# EAGLE board pcbqr_v3_allinone (EAGLE 5.11), part 1 of 2
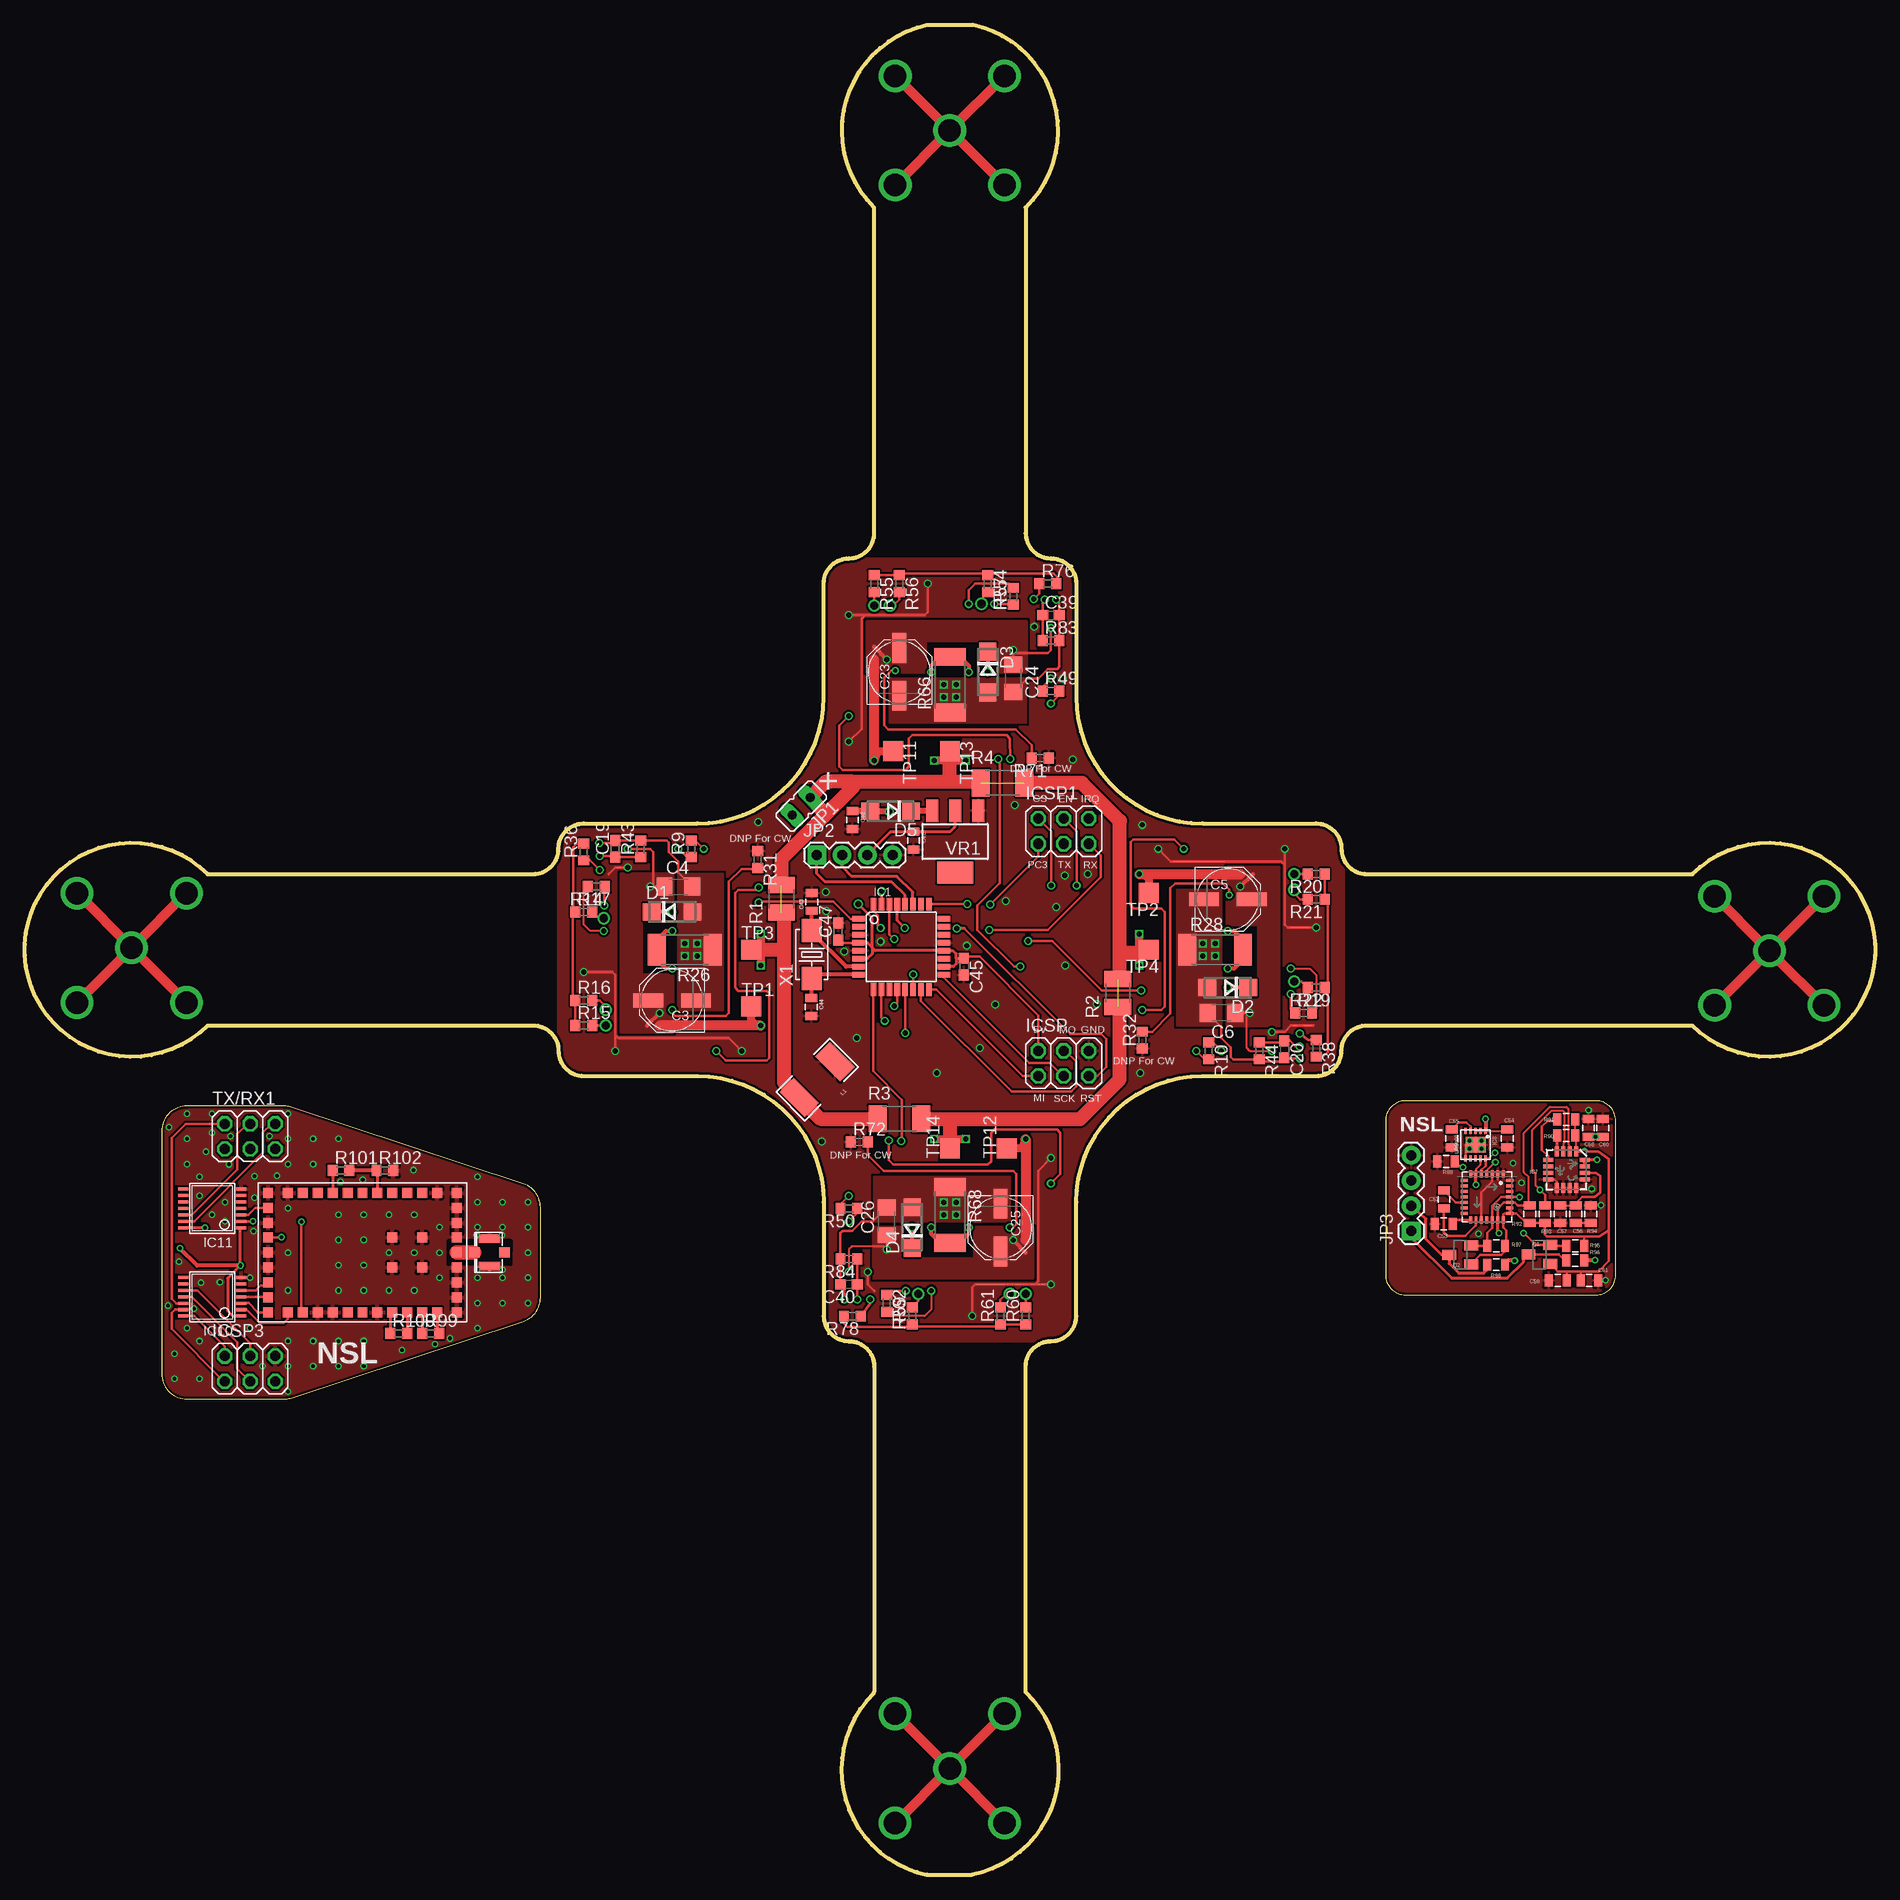
[diagram p0: board, top side]
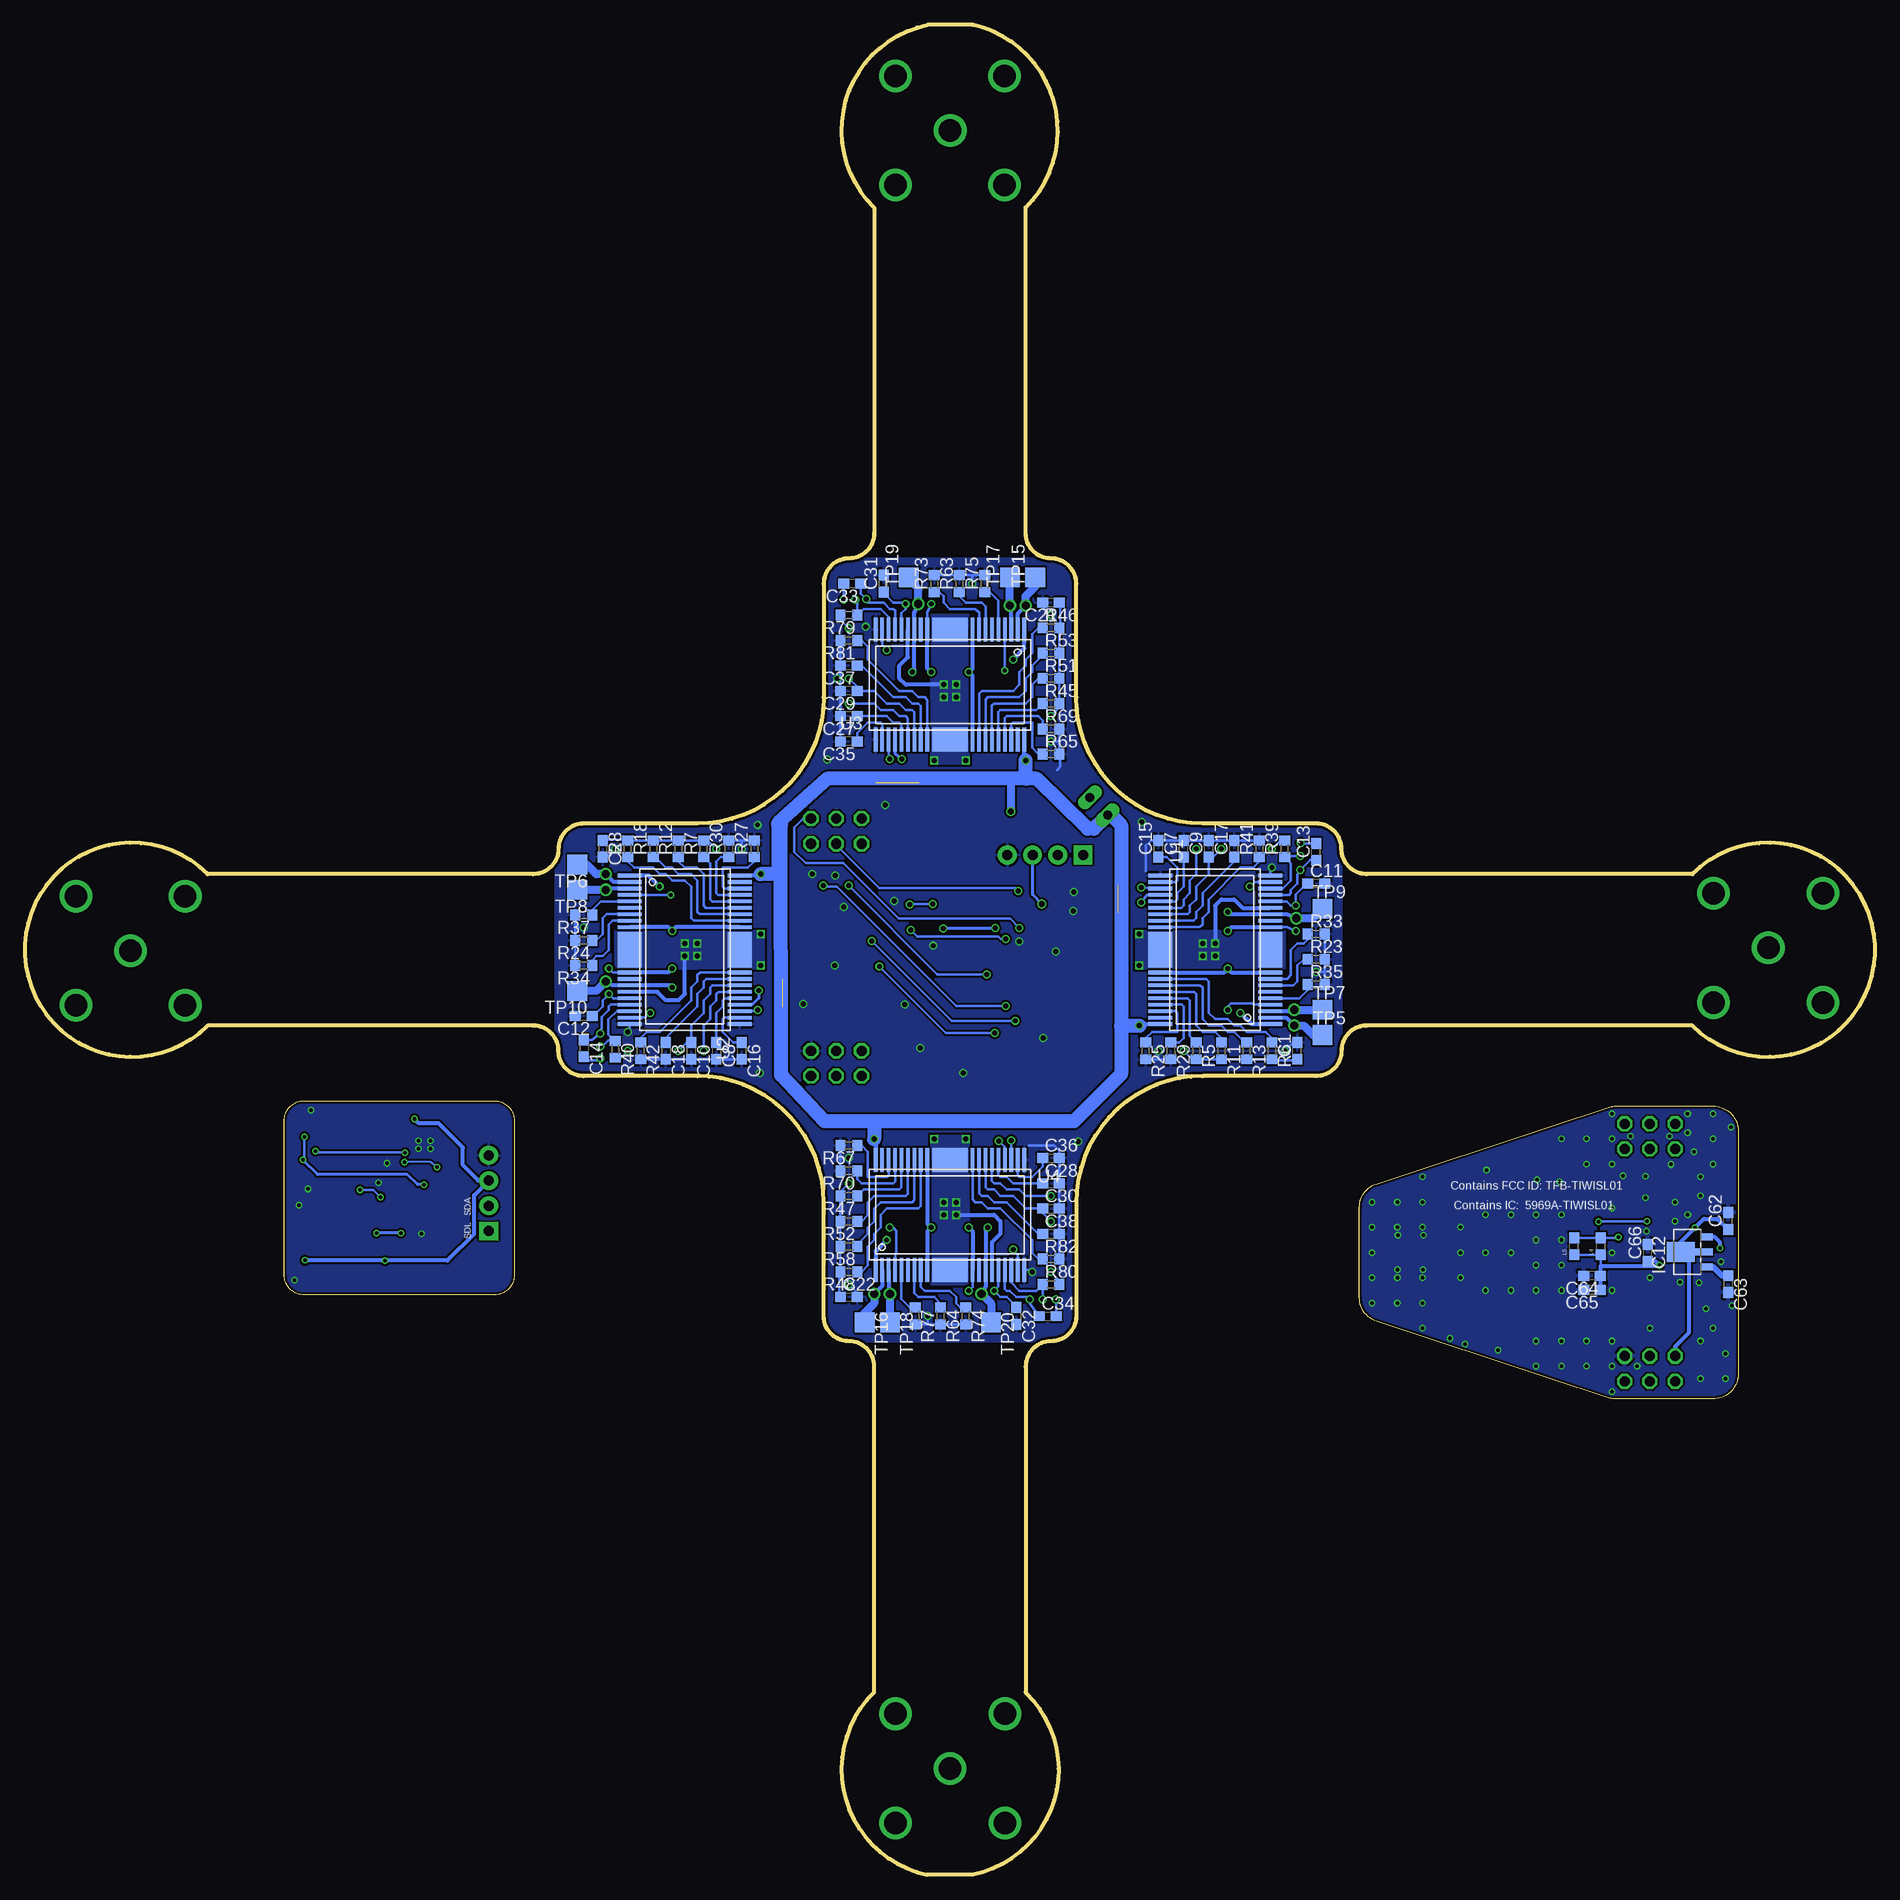
[diagram p1: board, bottom side, seen from below]

Size 186.07 x 186.08 mm. Coordinates in mm from the lower left corner, seen from the top.
Outline: 85.41,18.39 85.41,51.13 arc90 82.87,53.67 arc-90 80.33,56.21 80.33,67.64 arc90 67.63,80.34 56.2,80.34 arc-90 53.66,82.88 arc90 51.12,85.42 18.38,85.42 arc-270 18.38,100.66 51.12,100.66 arc90 53.66,103.2 arc-90 56.2,105.74 67.63,105.74 arc90 80.33,118.44 80.33,129.87 arc-90 82.87,132.41 arc90 85.41,134.95 85.41,167.69 arc-123 90.72,186.08 95.29,186.08 arc-124 100.65,167.69 100.65,134.95 arc90 103.19,132.41 arc-90 105.73,129.87 105.73,118.44 arc90 118.43,105.74 129.86,105.74 arc-90 132.4,103.2 arc90 134.94,100.66 167.68,100.66 arc-270 167.68,85.42 134.94,85.42 arc90 132.4,82.88 arc-90 129.86,80.34 118.43,80.34 arc90 105.73,67.64 105.73,56.21 arc-90 103.19,53.67 arc90 100.65,51.13 100.65,18.39
Outline: 85.36,18.26 arc124 90.72,0 95.29,0 arc124 100.65,18.36
Outline: 159.99,75.85 arc90 157.99,77.85 138.85,77.85 arc90 136.85,75.85 136.85,60.32 arc90 138.85,58.32 157.99,58.32 arc90 159.99,60.32 159.99,75.85
Outline: 26.85,77.19 arc18 26.05,77.32 16.3,77.32 arc90 13.76,74.78 13.76,50.39 arc90 16.3,47.85 26.05,47.85 arc18 26.85,47.98 50.12,55.66 arc72 51.86,58.07 51.86,67.1 arc72 50.12,69.51 26.85,77.19
Copper layers (1*16): Top 0.035mm / dielectric 1.5mm / Bottom 0.035mm
Design rules "ITead_rule *": minimum track width 6mil, minimum drill 12mil, track to track 6mil, track to pad 6mil, pad to pad 6mil, via to via 6mil, smd to smd 0mil, copper to edge 10mil, drill to drill 10mil, minimum pad ring 10mil, minimum via ring 6mil, stop-mask expansion 2mil, vias tented up to drill 20mil, thermal gap 10mil
Net classes: 0 default: width 0.203 mm, drill 0.356 mm, clearance 0.203 mm; 1 power: width 0.203 mm; 3 usbvcc: width 0.508 mm, drill 0.381 mm, clearance 0.203 mm
tRestrict: area 42.1,123.1 to 48.3,124.9; area 41.4,135.5 to 47.6,137.4; area 42.6,61.4 to 48.9,63.8
bRestrict: area 42.1,123.1 to 48.3,124.9; area 41.4,135.5 to 47.7,137.4

## Footprints (pad centres in the part's own frame; a part is rotated, then mirrored left to right if it is on the bottom)
U.FL = smd 2.2 x 0.85: P$1 0,1.375; P$2 0,-1.375 | smd 1.05 x 1: P$3 1.525,0; P$4 -1.525,0
C0603 = smd 1.1 x 1: 1 -0.85,0; 2 0.85,0
PANASONIC_D = smd 3 x 1.4: + 2.4,0; - -2.4,0
C1206 = smd 1.6 x 1.8: 1 -1.4,0; 2 1.4,0
0805 = smd 0.8 x 1.2: 1 -0.9,0; 2 0.9,0
SMA = smd 1.8 x 1.7: A 2.05,0; C -2.05,0
TQFP32-08 = smd 1.27 x 0.559: 1 -4.293,2.8; 2 -4.293,2; 3 -4.293,1.2; 4 -4.293,0.4; 5 -4.293,-0.4; 6 -4.293,-1.2; 7 -4.293,-2; 8 -4.293,-2.8; 17 4.293,-2.8; 18 4.293,-2; 19 4.293,-1.2; 20 4.293,-0.4; 21 4.293,0.4; 22 4.293,1.2; 23 4.293,2; 24 4.293,2.8 | smd 0.559 x 1.27: 9 -2.8,-4.293; 10 -2,-4.293; 11 -1.2,-4.293; 12 -0.4,-4.293; 13 0.4,-4.293; 14 1.2,-4.293; 15 2,-4.293; 16 2.8,-4.293; 25 2.8,4.293; 26 2,4.293; 27 1.2,4.293; 28 0.4,4.293; 29 -0.4,4.293; 30 -1.2,4.293; 31 -2,4.293; 32 -2.8,4.293
LGA28-5X5 = smd 0.7 x 0.3: 1 -2.3,1.65; 2 -2.3,1.1; 3 -2.3,0.55; 4 -2.3,0; 5 -2.3,-0.55; 6 -2.3,-1.1; 7 -2.3,-1.65; 15 2.3,-1.65; 16 2.3,-1.1; 17 2.3,-0.55; 18 2.3,0; 19 2.3,0.55; 20 2.3,1.1; 21 2.3,1.65 | smd 0.3 x 0.7: 8 -1.65,-2.3; 9 -1.1,-2.3; 10 -0.55,-2.3; 11 0,-2.3; 12 0.55,-2.3; 13 1.1,-2.3; 14 1.65,-2.3; 22 1.65,2.3; 23 1.1,2.3; 24 0.55,2.3; 25 0,2.3; 26 -0.55,2.3; 27 -1.1,2.3; 28 -1.65,2.3
LGA16-4X4 = smd 1 x 0.4: 1 -1.85,0.975; 2 -1.85,0.325; 3 -1.85,-0.325; 4 -1.85,-0.975; 9 1.85,-0.975; 10 1.85,-0.325; 11 1.85,0.325; 12 1.85,0.975 | smd 0.4 x 1: 5 -0.975,-1.85; 6 -0.325,-1.85; 7 0.325,-1.85; 8 0.975,-1.85; 13 0.975,1.85; 14 0.325,1.85; 15 -0.325,1.85; 16 -0.975,1.85
LLP-10 = smd 0.25 x 0.6: P$1 -1,-1.4; P$2 -0.5,-1.4; P$3 0,-1.4; P$4 0.5,-1.4; P$5 1,-1.4; P$6 1,1.4; P$7 0.5,1.4; P$8 0,1.4; P$9 -0.5,1.4; P$10 -1,1.4 | smd 2 x 1.6: P$11 0,0
TIWI-SL = smd 1 x 1: P$1 -6,7.5; P$2 -6,6; P$3 -6,4.5; P$4 -6,3; P$5 -6,1.5; P$6 -6,0; P$7 -6,-1.5; P$8 -6,-3; P$9 -6,-4.5; P$10 -6,-6; P$11 -6,-7.5; P$12 -6,-9.5; P$13 -4.5,-9.5; P$14 -3,-9.5; P$15 -1.5,-9.5; P$16 0,-9.5; P$17 1.5,-9.5; P$18 3,-9.5; P$19 4.5,-9.5; P$20 6,-9.5; P$21 6,-7.5; P$22 6,-6; P$23 6,-4.5; P$24 6,-3; P$25 6,-1.5; P$26 6,0; P$27 6,1.5; P$28 6,3; P$29 6,4.5; P$30 6,6; P$31 6,7.5; P$32 6,9.5; P$33 4.5,9.5; P$34 3,9.5; P$35 1.5,9.5; P$36 0,9.5; P$37 -1.5,9.5; P$38 -3,9.5; P$39 -4.5,9.5; P$40 -6,9.5; P$41 -1.5,6; P$42 1.5,6; P$43 -1.5,3; P$44 1.5,3
TSSOP-14 = smd 0.305 x 0.991: 1 -1.95,-2.918; 2 -1.3,-2.918; 3 -0.65,-2.918; 4 0,-2.918; 5 0.65,-2.918; 6 1.3,-2.918; 7 1.95,-2.918; 8 1.95,2.918; 9 1.3,2.918; 10 0.65,2.918; 11 0,2.918; 12 -0.65,2.918; 13 -1.3,2.918; 14 -1.95,2.918
SOT89-3L = smd 0.7 x 1.1: 1 -1.5,-1.75; 3 1.5,-1.75 | smd 0.7 x 1.8: 2 0,-1.4 | smd 2 x 2.8: 4 0,0.9
2X03 = drill 1.016 octagon: 1 -2.54,-1.27; 2 -2.54,1.27; 3 0,-1.27; 4 0,1.27; 5 2.54,-1.27; 6 2.54,1.27
JP1 = drill 0.914 long: 1 0,-1.27; 2 0,1.27
1X04 = drill 1.016 pad 1.88 square: 1 0,0 | drill 1.016 pad 1.88 round: 2 2.54,0; 3 5.08,0; 4 7.62,0
INDUCTOR-1206 = smd 2.032 x 3.556: P$1 -2.54,0; P$2 2.54,0
0603 = smd 1.1 x 1: 1 -0.85,0; 2 0.85,0
SOT23 = smd 1 x 1.4: 1 -0.95,-1.1; 2 0.95,-1.1; 3 0,1.1
R1210 = smd 1.6 x 2.7: 1 -1.4,0; 2 1.4,0
R2010 = smd 1.8 x 2.7: 1 -2.2,0; 2 2.2,0
R0603 = smd 1 x 1.1: 1 -0.85,0; 2 0.85,0
R2512 = smd 1.8 x 3.2: 1 -2.8,0; 2 2.8,0
TP20SQ = smd 2 x 2: TP 0,0
HSOP36-P-450-0.65 = smd 0.38 x 2.4: 1 -7.475,-5.525; 2 -6.825,-5.525; 3 -6.175,-5.525; 4 -5.525,-5.525; 5 -4.875,-5.525; 6 -4.225,-5.525; 7 -3.575,-5.525; 8 -2.925,-5.525; 9 -2.275,-5.525; 10 2.275,-5.525; 11 2.925,-5.525; 12 3.575,-5.525; 13 4.225,-5.525; 14 4.875,-5.525; 15 5.525,-5.525; 16 6.175,-5.525; 17 6.825,-5.525; 18 7.475,-5.525; 19 7.475,5.525; 20 6.825,5.525; 21 6.175,5.525; 22 5.525,5.525; 23 4.875,5.525; 24 4.225,5.525; 25 3.575,5.525; 26 2.925,5.525; 27 2.275,5.525; 28 -2.275,5.525; 29 -2.925,5.525; 30 -3.575,5.525; 31 -4.225,5.525; 32 -4.875,5.525; 33 -5.525,5.525; 34 -6.175,5.525; 35 -6.825,5.525; 36 -7.475,5.525 | smd 3.6 x 2.4: P1 0,-5.525; P2 0,5.525
SOT-223 = smd 1.219 x 2.235: 1 -2.311,-3.099; 2 0,-3.099; 3 2.311,-3.099 | smd 3.6 x 2.2: 4 0,3.099
5032 = smd 2.286 x 2.032: 1 -2.413,0; 2 2.413,0

## Placement (x,y rotation side)
ANT1  U.FL  [U.FL]  46.73,62.59 180 top
C1  1uF  [C0603]  58.11,82.88 90 bottom
C2  1uF  [C0603]  127.96,103.2 270 bottom
C3  68uF  [PANASONIC_D]  65.09,87.96 180 top
C4  10uF  [C1206]  65.73,99.39 0 top
C5  68uF  [PANASONIC_D]  120.97,98.12 0 top
C6  10uF  [C1206]  120.34,86.69 180 top
C7  0.1uF  [C0603]  69.54,103.2 90 bottom
C8  0.1uF  [C0603]  116.53,82.88 270 bottom
C9  1uF  [C0603]  67,103.2 90 bottom
C10  1uF  [C0603]  119.07,82.88 270 bottom
C11  0.1uF  [C0603]  56.2,99.71 0 bottom
C12  0.1uF  [C0603]  129.86,86.37 180 bottom
C13  DNP  [C0603]  56.2,102.9 90 bottom
C14  DNP  [C0603]  129.86,83.13 270 bottom
C15  DNP  [C0603]  72.08,103.2 90 bottom
C16  DNP  [C0603]  113.99,82.88 270 bottom
C17  100pF  [C0603]  64.46,103.2 90 bottom
C18  100pF  [C0603]  121.61,82.88 270 bottom
C19  0.1uF  [C0603]  59.38,103.2 90 top
C20  0.1uF  [C0603]  126.66,83.03 270 top
C21  1uF  [C0603]  82.87,127.97 180 bottom
C22  1uF  [C0603]  103.19,58.12 0 bottom
C23  68uF  [PANASONIC_D]  87.95,120.98 90 top
C24  10uF  [C1206]  99.38,120.35 270 top
C25  68uF  [PANASONIC_D]  98.11,65.1 270 top
C26  10uF  [C1206]  86.68,65.74 90 top
C27  0.1uF  [C0603]  103.19,116.54 180 bottom
C28  0.1uF  [C0603]  82.87,69.55 0 bottom
C29  1uF  [C0603]  103.19,119.08 180 bottom
C30  1uF  [C0603]  82.87,67.01 0 bottom
C31  0.1uF  [C0603]  99.7,129.87 90 bottom
C32  0.1uF  [C0603]  86.37,56.21 270 bottom
C33  DNP  [C0603]  102.86,129.87 180 bottom
C34  DNP  [C0603]  83.2,56.18 0 bottom
C35  DNP  [C0603]  103.19,114 180 bottom
C36  DNP  [C0603]  82.87,72.09 0 bottom
C37  100pF  [C0603]  103.19,121.62 180 bottom
C38  100pF  [C0603]  82.87,64.47 0 bottom
C39  0.1uF  [C0603]  103.19,126.7 0 top
C40  0.1uF  [C0603]  82.87,59.39 180 top
C41  10uF  [0805]  89.36,104.01 270 top
C42  10uF  [0805]  83.23,106.1 270 top
C43  18pF  [0805]  79.11,97.87 90 top
C44  18pF  [0805]  79.06,87.27 270 top
C45  0.1uF  [C0603]  94.43,91.34 270 top
C47  0.1uF  [C0603]  81.81,94.87 90 top
C52  .22uF  [0805]  142.72,67.92 90 top
C53  4.7uF  [0805]  142.69,65.48 180 top
C54  1uF  [0805]  149.07,74.07 270 top
C55  10nF  [0805]  143.48,74.07 270 top
C56  470nF  [0805]  155.97,66.45 270 top
C57  10nF  [0805]  154.43,66.45 270 top
C58  100nf  [0805]  157.24,75.11 90 top
C59  100nf  [0805]  154.15,59.77 180 top
C60  10uf  [0805]  158.67,75.11 90 top
C61  10uf  [0805]  157.35,59.77 0 top
C62  0.1uF  [C0603]  14.78,65.76 90 bottom
C63  0.1uF  [C0603]  14.78,59.41 270 bottom
C64  0.1uF  [C0603]  28.47,60.25 180 bottom
C65  0.1uF  [C0603]  28.47,58.83 180 bottom
C66  .3pf  [C0603]  22.85,62.53 90 bottom
D1  SCHOTTKY_SMA  [SMA]  65.09,96.85 0 top
D2  SCHOTTKY_SMA  [SMA]  120.97,89.23 180 top
D3  SCHOTTKY_SMA  [SMA]  96.84,120.98 270 top
D4  SCHOTTKY_SMA  [SMA]  89.22,65.1 90 top
D5  SCHOTTKY_SMA  [SMA]  87.06,107.01 180 top
IC1  MEGA8-AI  [TQFP32-08]  88.13,93.34 0 top
IC6  LSM303DLHSMD  [LGA28-5X5]  147.03,68.17 270 top
IC7  L3G4200D  [LGA16-4X4]  155.03,70.92 270 top
IC8  LP5996  [LLP-10]  145.89,73.43 180 top
IC9  TIWI-SL  [TIWI-SL]  33.95,62.59 270 top
IC10  TXS0104EPWR  [TSSOP-14]  18.84,58.14 90 top
IC11  TXS0104EPWR  [TSSOP-14]  18.84,67.03 90 top
IC12  AP1115B  [SOT89-3L]  18.64,62.64 90 bottom
ICSP  ICSP  [2X03]  104.46,81.61 0 top
ICSP1  ICSP  [2X03]  104.46,104.98 0 top
ICSP3  ICSP  [2X03]  22.65,50.9 0 top
JP1  [JP1]  78.06,107.48 135 top
JP2  [1X04]  79.65,102.57 0 top
JP3  [1X04]  139.41,64.74 90 top
L1  HF70ACC321611-T  [INDUCTOR-1206]  79.67,79.98 225 top
L4  1nH CI160808-1N0D  [0603]  27.58,63.22 90 bottom
L5  1nH CI160808-1N0D  [0603]  30.27,63.22 90 bottom
Q1  BSS123  [SOT23]  152.32,62.38 90 top
Q2  BSS123  [SOT23]  144.34,62.36 90 top
R1  0R  [R1210]  76.09,98.17 90 top
R2  0R  [R1210]  109.9,88.7 90 top
R3  0R  [R2010]  87.95,76.05 0 top
R4  0R  [R2010]  98.32,109.83 0 top
R5  DNP  [R0603]  68.27,82.88 270 bottom
R6  10k  [R0603]  60.65,82.88 270 bottom
R7  DNP  [R0603]  117.8,103.2 90 bottom
R8  10k  [R0603]  125.42,103.2 90 bottom
R9  240k  [R0603]  67,103.2 90 top
R10  240k  [R0603]  119.07,82.88 270 top
R11  0  [R0603]  65.73,82.88 270 bottom
R12  0  [R0603]  120.34,103.2 90 bottom
R13  0  [R0603]  63.19,82.88 270 bottom
R14  10k  [R0603]  57.47,99.39 180 top
R15  10k  [R0603]  56.2,85.42 0 top
R16  10k  [R0603]  56.2,87.96 0 top
R17  10k  [R0603]  56.2,96.85 0 top
R18  0  [R0603]  122.88,103.2 90 bottom
R19  10k  [R0603]  128.59,86.69 0 top
R20  10k  [R0603]  129.86,100.66 180 top
R21  10k  [R0603]  129.86,98.12 180 top
R22  10k  [R0603]  129.86,89.23 180 top
R23  DNP  [R0603]  56.2,92.09 0 bottom
R24  DNP  [R0603]  129.86,93.99 180 bottom
R25  0  [R0603]  73.35,82.88 270 bottom
R26  0.2, 2W  [R2512]  66.36,93.04 180 top
R27  0  [R0603]  112.72,103.2 90 bottom
R28  0.2, 2W  [R2512]  119.7,93.04 0 top
R29  0  [R0603]  70.81,82.88 270 bottom
R30  0  [R0603]  115.26,103.2 90 bottom
R31  0  [R0603]  73.7,102.13 270 top
R32  0  [R0603]  112.39,83.95 90 top
R33  DNP  [R0603]  56.2,94.63 0 bottom
R34  DNP  [R0603]  129.86,91.45 180 bottom
R35  0  [R0603]  56.2,89.55 0 bottom
R36  0  [R0603]  56.2,102.9 90 top
R37  0  [R0603]  129.86,96.53 180 bottom
R38  0  [R0603]  129.86,83.13 270 top
R39  10k  [R0603]  59.38,103.2 90 bottom
R40  10k  [R0603]  126.69,83.03 270 bottom
R41  10k  [R0603]  61.92,103.2 90 bottom
R42  10k  [R0603]  124.15,82.88 270 bottom
R43  10k  [R0603]  61.92,103.2 90 top
R44  10k  [R0603]  124.15,82.88 270 top
R45  DNP  [R0603]  82.87,117.81 0 bottom
R46  10k  [R0603]  82.87,125.43 0 bottom
R47  DNP  [R0603]  103.19,68.28 180 bottom
R48  10k  [R0603]  103.19,60.66 180 bottom
R49  240k  [R0603]  103.19,119.08 0 top
R50  240k  [R0603]  82.87,67.01 180 top
R51  0  [R0603]  82.87,120.35 0 bottom
R52  0  [R0603]  103.19,65.74 180 bottom
R53  0  [R0603]  82.87,122.89 0 bottom
R54  10k  [R0603]  99.38,128.6 90 top
R55  10k  [R0603]  85.41,129.87 270 top
R56  10k  [R0603]  87.95,129.87 270 top
R57  10k  [R0603]  96.84,129.87 270 top
R58  0  [R0603]  103.19,63.2 180 bottom
R59  10k  [R0603]  86.68,57.48 270 top
R60  10k  [R0603]  100.65,56.21 90 top
R61  10k  [R0603]  98.11,56.21 90 top
R62  10k  [R0603]  89.22,56.21 90 top
R63  DNP  [R0603]  92.08,129.87 90 bottom
R64  DNP  [R0603]  93.99,56.21 270 bottom
R65  0  [R0603]  82.87,112.73 0 bottom
R66  0.2, 2W  [R2512]  93.03,119.71 90 top
R67  0  [R0603]  103.19,73.36 180 bottom
R68  0.2, 2W  [R2512]  93.03,66.37 270 top
R69  0  [R0603]  82.87,115.27 0 bottom
R70  0  [R0603]  103.19,70.82 180 bottom
R71  0  [R0603]  102.1,112.32 180 top
R72  0  [R0603]  83.91,73.71 0 top
R73  DNP  [R0603]  94.62,129.87 90 bottom
R74  DNP  [R0603]  91.45,56.21 270 bottom
R75  0  [R0603]  89.54,129.87 90 bottom
R76  0  [R0603]  102.86,129.87 0 top
R77  0  [R0603]  96.53,56.21 270 bottom
R78  0  [R0603]  83.23,56.18 180 top
R79  10k  [R0603]  103.19,126.7 180 bottom
R80  10k  [R0603]  82.87,59.39 0 bottom
R81  10k  [R0603]  103.19,124.16 180 bottom
R82  10k  [R0603]  82.87,61.93 0 bottom
R83  10k  [R0603]  103.19,124.16 0 top
R84  10k  [R0603]  82.87,61.93 180 top
R89  10k  [0805]  142.92,71.73 0 top
R90  10k  [0805]  155.01,74.37 0 top
R91  10k  [0805]  155.01,75.97 0 top
R92  4.7k  [0805]  151.35,66.45 270 top
R93  4.7k  [0805]  152.88,66.45 270 top
R94  10k  [0805]  157.47,66.45 270 top
R95  10k  [0805]  155.92,63.27 0 top
R96  10k  [0805]  155.92,61.77 0 top
R97  10k  [0805]  147.95,63.27 0 top
R98  10k  [0805]  147.95,61.37 0 top
R99  0R  [R0603]  40.81,54.46 0 top
R100  0R  [R0603]  37.59,54.46 0 top
R101  0R  [R0603]  31.79,70.84 0 top
R102  0R - TEST DNP  [R0603]  36.21,70.84 0 top
TP1  TPTP20SQ  [TP20SQ]  73.03,87.33 0 top
TP2  TPTP20SQ  [TP20SQ]  113.04,98.76 180 top
TP3  TPTP20SQ  [TP20SQ]  73.03,93.04 0 top
TP4  TPTP20SQ  [TP20SQ]  113.04,93.04 180 top
TP5  TPTP20SQ  [TP20SQ]  55.57,84.47 0 bottom
TP6  TPTP20SQ  [TP20SQ]  130.5,101.61 180 bottom
TP7  TPTP20SQ  [TP20SQ]  55.57,87.01 0 bottom
TP8  TPTP20SQ  [TP20SQ]  130.5,99.07 180 bottom
TP9  TPTP20SQ  [TP20SQ]  55.57,97.17 0 bottom
TP10  TPTP20SQ  [TP20SQ]  130.5,88.91 180 bottom
TP11  TPTP20SQ  [TP20SQ]  87.32,113.04 270 top
TP12  TPTP20SQ  [TP20SQ]  98.75,73.04 90 top
TP13  TPTP20SQ  [TP20SQ]  93.03,113.04 270 top
TP14  TPTP20SQ  [TP20SQ]  93.03,73.04 90 top
TP15  TPTP20SQ  [TP20SQ]  84.46,130.51 90 bottom
TP16  TPTP20SQ  [TP20SQ]  101.61,55.58 270 bottom
TP17  TPTP20SQ  [TP20SQ]  87,130.51 90 bottom
TP18  TPTP20SQ  [TP20SQ]  99.07,55.58 270 bottom
TP19  TPTP20SQ  [TP20SQ]  97.16,130.51 90 bottom
TP20  TPTP20SQ  [TP20SQ]  88.91,55.58 270 bottom
TX/RX1  TX/RX  [2X03]  22.65,74.27 0 top
U1  TB6588FG  [HSOP36-P-450-0.65]  66.36,93.04 90 bottom
U2  TB6588FG  [HSOP36-P-450-0.65]  119.7,93.04 270 bottom
U3  TB6588FG  [HSOP36-P-450-0.65]  93.03,119.71 180 bottom
U4  TB6588FG  [HSOP36-P-450-0.65]  93.03,66.37 0 bottom
VR1  NCP1117ST50T3G  [SOT-223]  93.55,103.92 180 top
X1  16Mhz  [5032]  79.14,92.56 90 top

## Library data of the parts
ANT1 C41 C42 C52-C61 IC7 JP2 JP3 L1 L4 L5 R89-R98 = SparkFun
C1-C40 C45 C47 C62-C66 R1-R84 = rcl
C43 C44 = slice_noshift
D1-D5 U1-U4 VR1 = sc_usercreated
IC1 = atmel; MPN: ATMEGA8-16AU; OC_FARNELL: 9171371; OC_NEWARK: 73M8863
IC6 = imu
IC8 = pcbqr
IC9-IC11 R99-R102 = pcbqr_v3
IC12 = wifi
ICSP ICSP1 ICSP3 TX/RX1 = pinhead
JP1 = jumper
Q1 Q2 = transistor-small-signal
TP1-TP20 = testpad
X1 = NSL_MiniQuad

## Nets
1V8: C59.1 C61.1 IC6.5 IC6.21 IC6.22 IC6.23 IC7.1 IC8.P$10 Q1.1 Q2.1 R90.2 R91.2 R92.2 R93.2 R95.2 R97.2
3V1: C58.1 C60.1 IC6.6 IC6.7 IC7.15 IC7.16 IC8.P$9
3V2 [power]: C64.1 C65.1 C66.1 IC10.1 IC11.1 IC12.3 L4.1 L5.1
5V: C41.1 C45.1 C47.1 IC1.4 IC1.6 IC1.18 IC1.20 ICSP.2 JP2.3 VR1.2
5V2: C54.1 IC8.P$1 IC8.P$2 IC8.P$3 JP3.3 R96.2 R98.2
5V3 [power]: C62.1 IC10.14 IC11.14 IC12.2 IC12.4 ICSP3.2
CS: IC1.14 ICSP1.2
CS2: IC10.12 TX/RX1.2
DIR1: R31.2 U1.4
DIR2: R71.2 U3.4
DIR3: R32.2 U2.4
DIR4: R72.2 U4.4
GND: C1.2 C2.2 C7.2 C8.2 C9.2 C10.2 C11.2 C12.2 C15.2 C16.2 C17.2 C18.2 C21.2 C22.2 C27.2 C28.2 C29.2 C30.2 C31.2 C32.2 C35.2 C36.2 C37.2 C38.2 C41.2 C42.2 C43.2 C44.2 C45.2 C47.2 IC1.3 IC1.5 IC1.21 ICSP.6 JP2.4 L1.P$1 R23.2 R24.2 R25.2 R27.2 R29.2 R30.2 R31.1 R32.1 R33.2 R34.2 R35.2 R37.2 R41.2 R42.2 R63.2 R64.2 R65.2 R67.2 R69.2 R70.2 R71.1 R72.1 R73.2 R74.2 R75.2 R77.2 R81.2 R82.2 U1.18 U1.19 U2.18 U2.19 U3.18 U3.19 U4.18 U4.19 VR1.1
GND2: C53.2 C54.2 C55.2 C57.2 C58.2 C59.2 C60.2 C61.2 IC6.1 IC6.2 IC6.3 IC6.17 IC6.28 IC7.8 IC7.9 IC7.10 IC7.11 IC7.12 IC7.13 IC8.P$6 IC8.P$11 JP3.4 R89.1 R94.1
GND3: ANT1.P$1 ANT1.P$2 C62.2 C63.2 C64.2 C65.2 C66.2 IC9.P$1 IC9.P$11 IC9.P$12 IC9.P$14 IC9.P$16 IC9.P$17 IC9.P$23 IC9.P$24 IC9.P$27 IC9.P$32 IC9.P$33 IC9.P$34 IC9.P$35 IC9.P$37 IC9.P$38 IC9.P$39 IC9.P$40 IC9.P$41 IC9.P$42 IC9.P$43 IC9.P$44 IC10.7 IC11.7 ICSP3.6 R102.2
MAG1: IC1.1 U1.22
MAG2: IC1.13 U3.22
MAG3: IC1.10 U2.22
MAG4: IC1.9 U4.22
MISO: IC1.16 ICSP.1
MISO2: IC10.13 ICSP3.1
MOSI: IC1.15 ICSP.4
MOSI2: IC10.10 ICSP3.4
N$2: C43.1 IC1.7 X1.2
N$3: R15.1 R16.1 R17.1 R36.2
N$4: R14.2 R26.2 U1.9 U1.10 U1.28
N$5: R15.2 TP5.TP U1.2
N$6: R16.2 TP7.TP U1.3
N$7: D1.C R17.2 TP9.TP U1.12
N$8: R35.1 U1.5
N$9: R33.1 U1.8
N$10: R9.2 U1.24
N$11: R29.1 U1.33
N$12: R25.1 U1.34
N$13: R23.1 U1.7
N$14: C17.1 U1.26
N$15: R41.1 U1.27
N$16: R13.1 U1.30
N$17: R11.1 U1.31
N$18: C9.1 R9.1 U1.25
N$19: R5.1 U1.32
N$20: C7.1 U1.23
N$21: R6.1 U1.29
N$22: C19.1 R39.1 R43.1 U1.16
N$23: R54.2 R66.2 U3.9 U3.10 U3.28
N$24: C13.1 R36.1 U1.15
N$25: C11.1 R14.1 U1.14
N$26: C15.1 U1.20
N$27: R55.2 TP15.TP U3.2
N$28: R56.2 TP17.TP U3.3
N$29: D3.C R57.2 TP19.TP U3.12
N$30: R75.1 U3.5
N$31: R73.1 U3.8
N$32: R69.1 U3.33
N$33: R65.1 U3.34
N$34: R63.1 U3.7
N$35: C37.1 U3.26
N$36: R81.1 U3.27
N$37: R53.1 U3.30
N$38: R51.1 U3.31
N$39: R49.2 U3.24
N$40: C29.1 R49.1 U3.25
N$41: C27.1 U3.23
N$42: R45.1 U3.32
N$43: R46.1 U3.29
N$44: R55.1 R56.1 R57.1 R76.2
N$45: C33.1 R76.1 U3.15
N$46: C31.1 R54.1 U3.14
N$47: C39.1 R79.1 R83.1 U3.16
N$48: C35.1 U3.20
N$49: R19.2 R28.2 U2.9 U2.10 U2.28
N$50: R20.2 TP6.TP U2.2
N$51: R21.2 TP8.TP U2.3
N$52: D2.C R22.2 TP10.TP U2.12
N$53: R37.1 U2.5
N$54: R34.1 U2.8
N$55: R30.1 U2.33
N$56: R27.1 U2.34
N$57: R24.1 U2.7
N$58: C18.1 U2.26
N$59: R42.1 U2.27
N$60: R18.1 U2.30
N$61: R12.1 U2.31
N$62: R10.2 U2.24
N$63: C10.1 R10.1 U2.25
N$64: C8.1 U2.23
N$65: R7.1 U2.32
N$66: R8.1 U2.29
N$67: R20.1 R21.1 R22.1 R38.2
N$68: C14.1 R38.1 U2.15
N$69: C12.1 R19.1 U2.14
N$70: C20.1 R40.1 R44.1 U2.16
N$71: C16.1 U2.20
N$72: R59.2 R68.2 U4.9 U4.10 U4.28
N$73: R60.2 TP16.TP U4.2
N$74: R61.2 TP18.TP U4.3
N$75: D4.C R62.2 TP20.TP U4.12
N$76: R77.1 U4.5
N$77: R74.1 U4.8
N$78: R70.1 U4.33
N$79: R67.1 U4.34
N$80: R64.1 U4.7
N$81: C38.1 U4.26
N$82: R82.1 U4.27
N$83: R58.1 U4.30
N$84: R52.1 U4.31
N$85: R50.2 U4.24
N$86: C30.1 R50.1 U4.25
N$87: C28.1 U4.23
N$88: R47.1 U4.32
N$89: R48.1 U4.29
N$90: R60.1 R61.1 R62.1 R78.2
N$91: C34.1 R78.1 U4.15
N$92: C32.1 R59.1 U4.14
N$93: C40.1 R80.1 R84.1 U4.16
N$94: C36.1 U4.20
N$95: C44.1 IC1.8 X1.1
N$96: D5.C VR1.3
N$106: C52.1 IC6.16
N$107: C52.2 IC6.12
N$108: C56.1 C57.1 IC7.14
N$109: C56.2 R94.2
N$110: C55.1 IC8.P$4
N$111: IC7.5 R91.1
N$112: C53.1 IC6.15
N$113: IC9.P$31 R99.2
N$114: IC9.P$30 R99.1
N$115: IC9.P$29 R100.2
N$116: IC9.P$28 R100.1
N$118: IC9.P$8 R101.1
N$119: IC9.P$5 R101.2 R102.1
N$122: IC9.P$15 L4.2 L5.2
N$123: IC10.8
N$127: IC11.4
N$128: IC11.5
N$129: IC11.11
N$130: IC11.10
N$131: IC11.8
N$132: TX/RX1.1
N$133: C63.1 IC12.1
N$134: ANT1.P$3 IC9.P$36
PC3: IC1.25 ICSP1.1
PWR_EN1: IC9.P$13 IC11.3
RST: IC1.29 ICSP.5
RST2: ICSP3.5
RX: IC1.30 ICSP1.5
RX2: TX/RX1.5
SA0_A: IC6.4 R89.2
SA0_G: IC7.4 R90.1
SCK: IC1.17 ICSP.3
SCK2: IC10.11 ICSP3.3
SCL: IC6.20 IC6.24 IC7.2 Q1.2 R92.1 R95.1
SCL_MCU: IC1.28 JP2.1
SCL_MCU1: JP3.1 Q1.3 R96.1
SDA: IC6.19 IC6.25 IC7.3 Q2.2 R93.1 R97.1
SDA_MCU: IC1.27 JP2.2
SDA_MCU1: JP3.2 Q2.3 R98.1
SPI_CLK1: IC9.P$19 IC10.4
SPI_CS1: IC9.P$20 IC10.3
SPI_DI1: IC9.P$18 IC10.5
SPI_DO1: IC9.P$21 IC10.2
SPI_IRQ1: IC9.P$22 IC11.2
TX: IC1.31 ICSP1.3
TX2: TX/RX1.3
V+: C3.+ C4.1 C5.+ C6.1 C23.+ C24.1 C25.+ C26.1 C42.1 D5.A JP1.2 R39.2 R40.2 R79.2 R80.2 TP1.TP TP2.TP TP11.TP TP12.TP U1.1 U1.17 U1.36 U2.1 U2.17 U2.36 U3.1 U3.17 U3.36 U4.1 U4.17 U4.36
V-: C3.- C4.2 C5.- C6.2 C13.2 C14.2 C19.2 C20.2 C23.- C24.2 C25.- C26.2 C33.2 C34.2 C39.2 C40.2 D1.A D2.A D3.A D4.A JP1.1 L1.P$2 R1.1 R1.2 R2.1 R2.2 R3.1 R3.2 R4.1 R4.2 R26.1 R28.1 R43.2 R44.2 R66.1 R68.1 R83.2 R84.2 TP3.TP TP4.TP TP13.TP TP14.TP U1.13 U1.P1 U1.P2 U2.13 U2.P1 U2.P2 U3.13 U3.P1 U3.P2 U4.13 U4.P1 U4.P2
VR1: C1.1 R5.2 R6.2 R11.2 R13.2 U1.21
VR2: C21.1 R45.2 R46.2 R51.2 R53.2 U3.21
VR3: C2.1 R7.2 R8.2 R12.2 R18.2 U2.21
VR4: C22.1 R47.2 R48.2 R52.2 R58.2 U4.21
WIFI_EN: IC1.12 ICSP1.4
WIFI_EN2: IC11.12 TX/RX1.4
WIFI_IRQ: IC1.32 ICSP1.6
WIFI_IRQ2: IC11.13 TX/RX1.6